# Altium PCB PCB_SOLDER_HOTAIR_STATION_V1.0_06052016.PcbDoc (part 1 of 2)
Units mil, origin at the board's own origin, x right, y up, seen from the top; angles counter-clockwise.
Board outline 3402 x 1915 mil, 2 copper layers (Top Layer, Bottom Layer); 77 components, 65 nets, 244 pads, 86 vias.
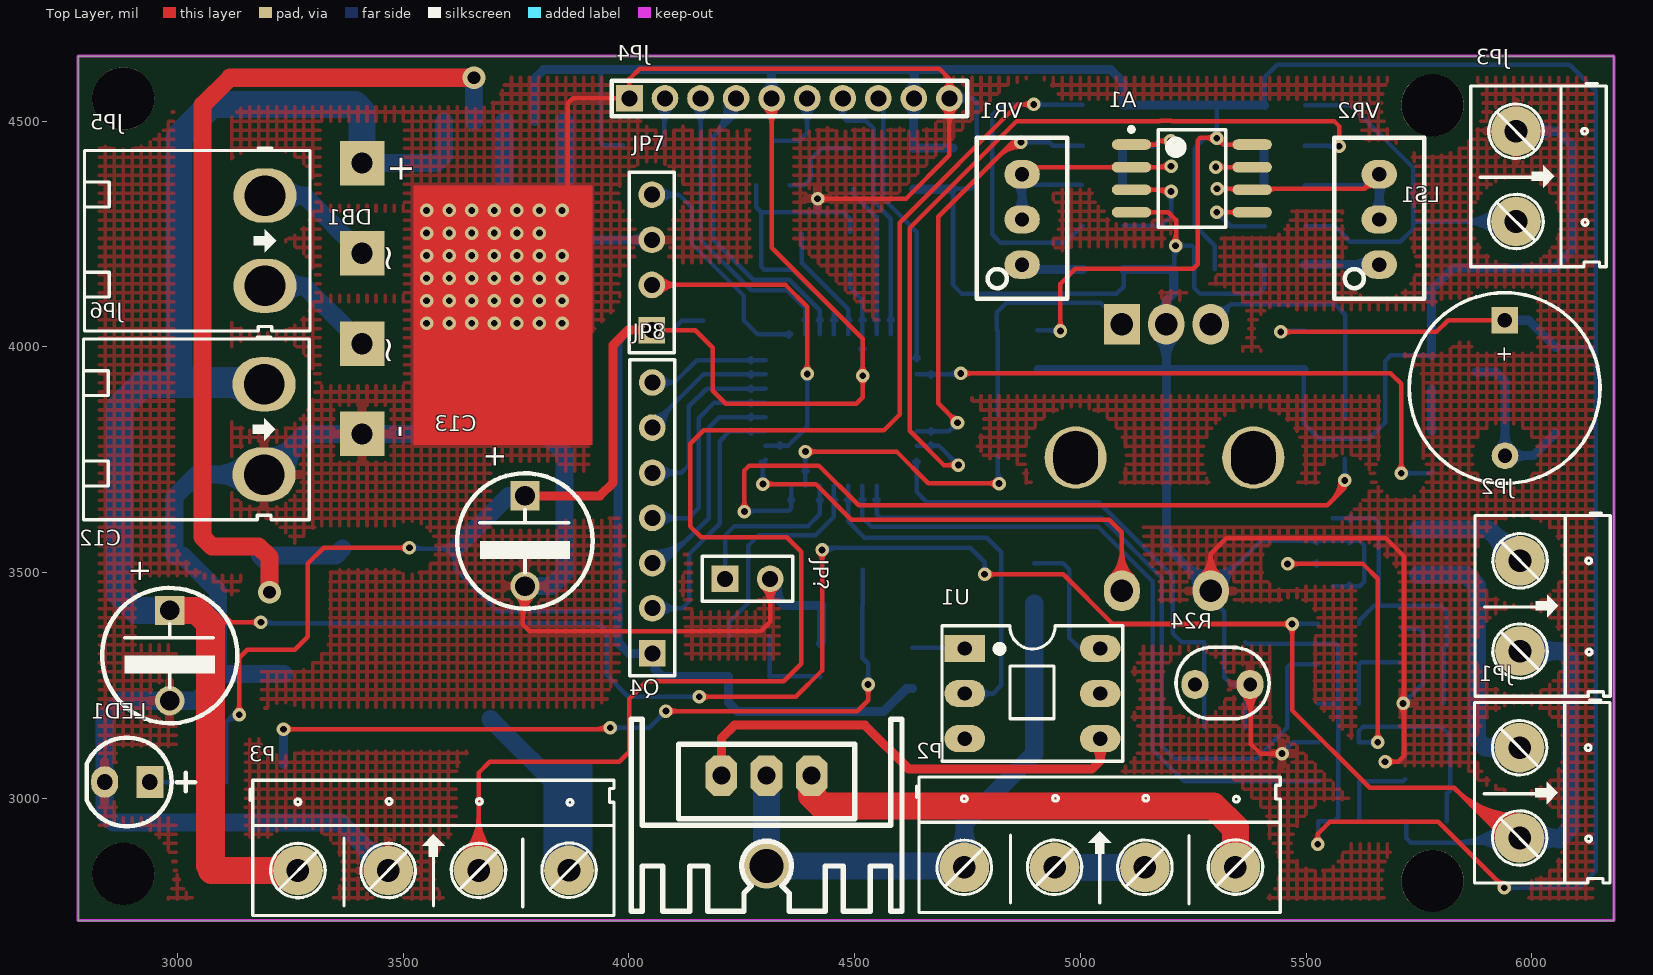
[diagram p0: Top Layer view]
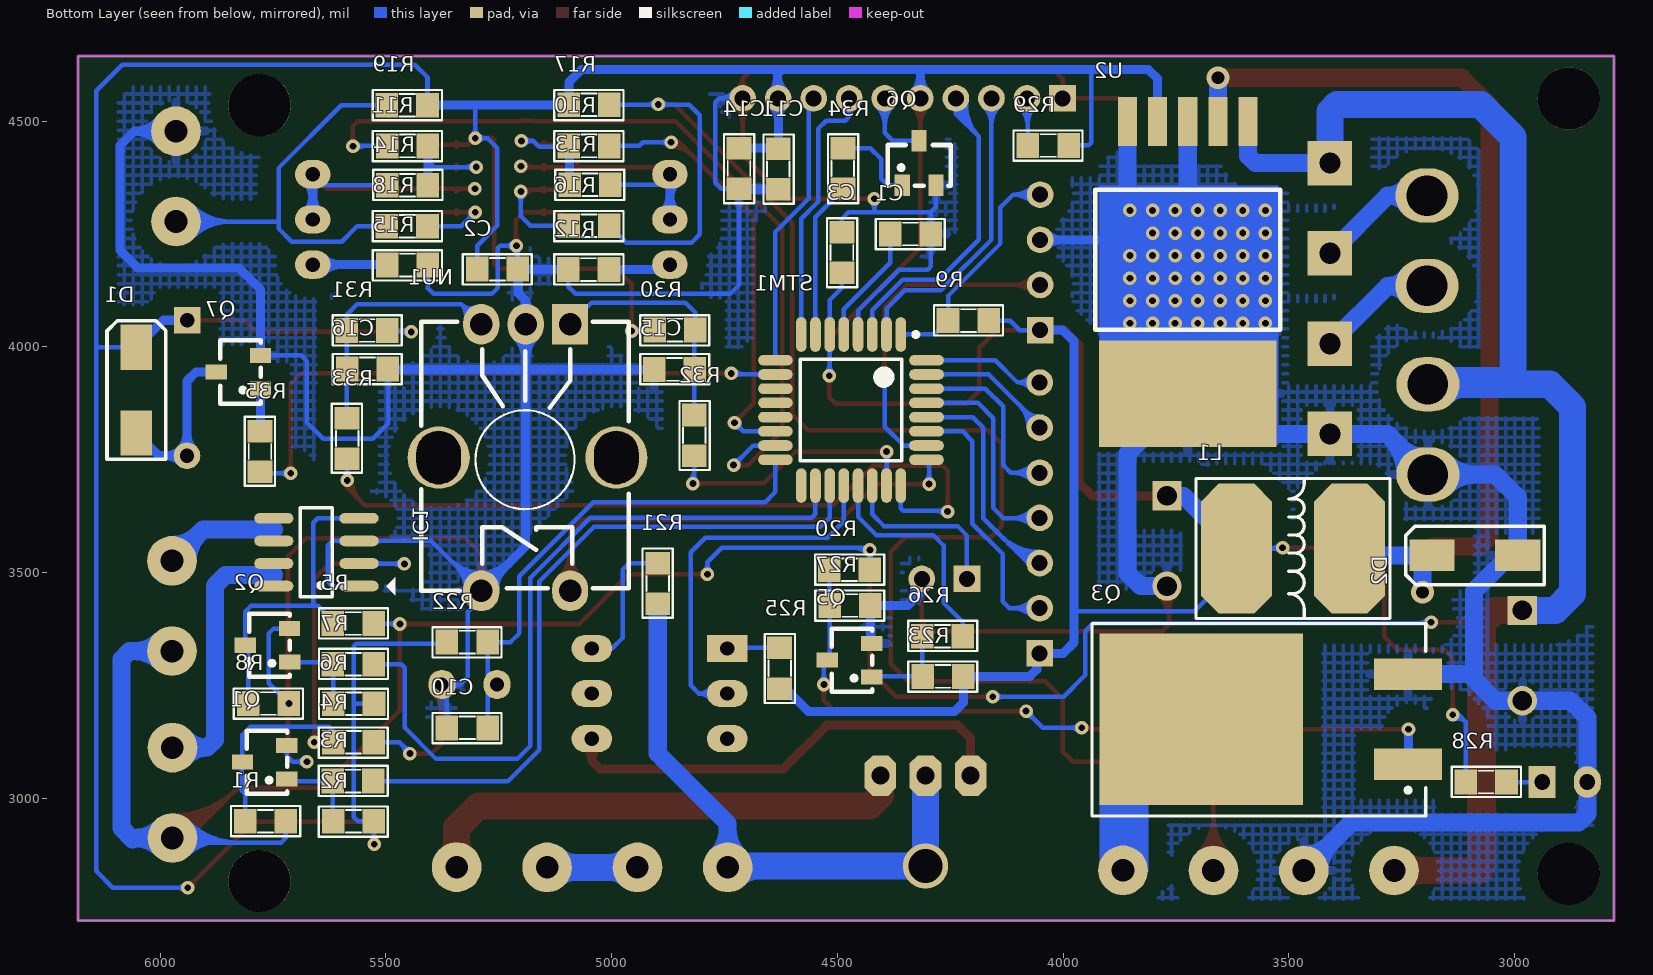
[diagram p1: Bottom Layer view, seen from below]

## Layer stack, top to bottom
Top Solder: solder mask 0.4, Solder Resist, Dk 3.5
Top Layer: signal copper 1.4
Dielectric 1: dielectric 12.6, FR-4, Dk 4.8
Bottom Layer: signal copper 1.4
Bottom Solder: solder mask 0.4, Solder Resist, Dk 3.5

## Board outline
2780,2729 6182,2729 6182,4644 2780,4644

## Design rules (kind name [scope] priority, off if disabled: settings)
Clearance Polygon [InPolygon] p1: gap=40
Clearance [All] p2: gap=10
PolygonConnect [All] p1: connectstyle=Relief reliefconductorwidth=20 reliefentries=4 polygonreliefangle="90 Angle" airgapwidth=10
RoutingVias [All] p1: holewidth=28 width=50 viastyle="Through Hole" minholewidth=15 minwidth=30 maxholewidth=28 maxwidth=50
SolderMaskExpansion [All] p1: expansion=4
Width [All] p1: maxlimit=60 minlimit=10 preferedwidth=20
30 further rules are at their usual default settings.

## Components (designator, comment, footprint, x,y, rotation, side; value= is the part's Value field where it differs from the comment)
A1 "LM358" SO-8N 5247,4373 r0 top
C1 "104" "Tu 0805" 4338,4250 r180 bottom
C2 "104" "Tu 0805" 5253,4172 r180 bottom
C3 "104" "Tu 0805" 4490,4209 r90 bottom
C10 "104" "Tu 0805" 5320,3156 r180 bottom
C11 "104" "Tu 0805" 4631,4394 r90 bottom
C12 "Tu Nhom 100uF - 50V" CAP1000uF25V 2983,3316 r90 top
C13 "Tu Nhom 470uF - 16V" CAP1000uF25V 3770,3570 r90 top
C14 "104" "Tu 0805" 4718,4395 r90 bottom
C15 "104" "Tu 0805" 4861,3950 r0 bottom
C16 "104" "Tu 0805" 5541,3951 r180 bottom
D1 "1N4007" "DO - SMB" 6053,3904 r270 bottom
D2 "Diode SS34" "DO - SMB" 3088,3538 r180 bottom
DB1 "KBU1008" "DIODE BRIDGE(FLAT) BIG" 3383,4107 r270 top
IC1 "APM4953" SO-8 5654,3545 r0 bottom
JP1 "?" "Con 2 KF301 5.08" 6013,2797 r270 top
JP2 "?" "Con 2 KF301 5.08" 6014,3211 r270 top
JP3 "?" "Con 2 KF301 5.08" 6005,4162.5 r270 top
JP4 "HEADER 10" "HDR1x10  2.0MM" 4001.37,4550.37 r0 top
JP5 "?" "CON 2 EDG 5.08" 3194,4335 r270 top
JP6 "?" "CON 2 EDG 5.08" 3192,3917 r270 top
JP7 "Jump 1x4 DT 2.54" HDR1X4 4051,4037 r90 top
JP8 "Jump 1x7 DT 2.54" HDR1X7 4052,3321 r90 top
JP? "Jump 1x2 DT 2.54" HDR1X2 4213,3486 r0 top
L1 "100uH CD74" "Cuon Cam 7.5x7x5" 3341,3553 r90 bottom
LED1 "LED0805 Màu Do" "LED 3mm Do" 2889,3036 r180 top
LS1 "SPEAKER" SPEAKER 5940.23,4058.79 r270 top
NU1 "Num Xoay EC11" "Num Xoay EC11" 5092,4050 r0 bottom
P2 "Header 4" "Con 4 KF301 5.08" 5108,2907 r0 top
P3 "Header 4" "Con 4 KF301 5.08" 3632,2900 r0 top
Q1 "S8050" SOT23B 5763.66,3085 r90 bottom
Q2 "S8050" SOT23B 5757.66,3344 r90 bottom
Q3 "IRF3709" TO_263_2 3494,3175 r0 bottom
Q4 "TRIAC" QTO-220H3 4405,3050 r180 top
Q5 "S8050" SOT23B 4468,3311 r90 bottom
Q6 "C1815" SOT23B 4314,4402 r180 bottom
Q7 "S8050" SOT23B 5822,3949 r90 bottom
R1 "4.7k" "Tro SMD 0805" 5767,2949 r0 bottom
R2 "4.7k" "Tro SMD 0805" 5572,2949 r180 bottom
R3 "1k" "Tro SMD 0805" 5573,3038 r0 bottom
R4 "4.7k" "Tro SMD 0805" 5572,3124 r180 bottom
R5 "4.7k" "Tro SMD 0805" 5572.5,3387 r0 bottom
R6 "4.7k" "Tro SMD 0805" 5571.5,3209.5 r180 bottom
R7 "1k" "Tro SMD 0805" 5572.5,3297 r0 bottom
R8 "4.7k" "Tro SMD 0805" 5760,3210 r180 bottom
R9 "4.7K" "Tro SMD 0805" 4210,4058 r0 bottom
R10 "100K" "Tro SMD 0805" 5050,4445 r180 bottom
R11 "100K" "Tro SMD 0805" 5452,4445 r180 bottom
R12 "1.5K" "Tro SMD 0805" 5051,4171 r0 bottom
R13 "390K" "Tro SMD 0805" 5048,4359 r180 bottom
R14 "390K" "Tro SMD 0805" 5452,4358 r0 bottom
R15 "1.5K" "Tro SMD 0805" 5452,4181 r180 bottom
R16 "10K" "Tro SMD 0805" 5050,4268 r180 bottom
R17 "1.5K" "Tro SMD 0805" 5050,4536 r180 bottom
R18 "10K" "Tro SMD 0805" 5453,4267 r0 bottom
R19 "1.5K" "Tro SMD 0805" 5453,4535 r0 bottom
R20 "4.7k" "Tro SMD 0805" 4473,3506 r0 bottom
R21 "470R" "Tro SMD 0805" 4898,3476 r270 bottom
R22 "15K" "Tro SMD 0805" 5320,3346 r180 bottom
R23 "4.7k" "Tro SMD 0805" 4266,3270 r180 bottom
R24 "NTC10D" "NTC MF52T" 5411,3255 r0 top
R25 "Tro 0805 5% 200R" "Tro SMD 0805" 4628,3288 r90 bottom
R26 "1k" "Tro SMD 0805" 4267,3359 r0 bottom
R27 "4.7k" "Tro SMD 0805" 4472,3427 r180 bottom
R28 "Tro 0805 1K 5%" "Tro SMD 0805" 3063,3036 r0 bottom
R29 "Tro 0805 4.7k" "Tro SMD 0805" 4033,4446 r180 bottom
R30 "10k" "Tro SMD 0805" 4860,4037 r180 bottom
R31 "10k" "Tro SMD 0805" 5542,4036 r0 bottom
R32 "10k" "Tro SMD 0805" 4817,3804 r90 bottom
R33 "10k" "Tro SMD 0805" 5586,3797 r270 bottom
R34 "Tro 0805 1k" "Tro SMD 0805" 4488,4395 r90 bottom
R35 "Tro 0805 1k" "Tro SMD 0805" 5779,3768 r270 bottom
STM1 "STM8S003K3" 32A_M 4470,3860 r270 bottom
U1 "MOC3021" DIP6 4744,3332 r270 top
U2 "LM2576S-3.3V" TO263-5 3724,4498 r0 bottom
VR1 "100K" RVAR10K 4871,4282 r90 top
VR2 "100K" RVAR10K 5662,4282 r90 top

## Footprints (in the part's own frame and the unit in brackets; to place one, negate y for a bottom-side part, rotate by r counter-clockwise, add the part's x,y. Pads: shape width x height; smd on the part's side, far side on the other; paste and mask are expansions set on the pad)
32A_M [mm] "Thin QFP, 32-Leads, Body 7x7mm, Pitch 0.8mm, IPC Low Density"
  oval 1.95x0.6 smd: 1(-4.25,2.8) 2(-4.25,2) 3(-4.25,1.2) 4(-4.25,0.4) 5(-4.25,-0.4) 6(-4.25,-1.2) 7(-4.25,-2) 8(-4.25,-2.8) 17(4.25,-2.8) 18(4.25,-2) 19(4.25,-1.2) 20(4.25,-0.4) 21(4.25,0.4) 22(4.25,1.2) 23(4.25,2) 24(4.25,2.8)
  oval 0.6x1.95 smd: 9(-2.8,-4.25) 10(-2,-4.25) 11(-1.2,-4.25) 12(-0.4,-4.25) 13(0.4,-4.25) 14(1.2,-4.25) 15(2,-4.25) 16(2.8,-4.25) 25(2.8,4.25) 26(2,4.25) 27(1.2,4.25) 28(0.4,4.25) 29(-0.4,4.25) 30(-1.2,4.25) 31(-2,4.25) 32(-2.8,4.25)
  silkscreen extent -4.37,-2.85 2.85,3.77, body extent -4.49,-4.52 4.54,4.52, height 1.61
CAP1000uF25V [mil]
  rect 65x65 hole 43.31: 1(100,0)
  round 65 hole 43.31: 2(-100,0)
  silkscreen extent -150,-150 150,150, body extent -195,-200 205,200, height 400
"CON 2 EDG 5.08" [mil] "Header 2, 2 pin, hight 300mil, Pin to Pin 200, Colour Green"
  oval 120x140 hole 90: 1(0,0) 2(200,0)
  silkscreen extent -105,-400 300,100, body extent -97,-399 297,73, height 334
"Con 2 KF301 5.08" [mil]
  round 110 hole 50: 1(-315,-40) 2(-115,-40)
  silkscreen extent -421,-140 -15,160, body extent -360,-137 -60,150, height 335
"Con 4 KF301 5.08" [mil]
  round 110 hole 50: 1(-365,-60) 2(-165,-60) 3(35.06,-59.94) 4(235.39,-59.61)
  silkscreen extent -471,-160 335,140
"Cuon Cam 7.5x7x5" [mm]
  oct 7.3x4 smd: 1(0,0.635) 2(0,6.985)
  silkscreen extent -3.94,-1.65 3.94,9.27, body extent -3.5,0.07 3.5,7.8, height 5.02
"DIODE BRIDGE(FLAT) BIG" [mil]
  rect 98.43x98.43 hole 47.24: 1(-300,26) 2(-100,26) 3(100,26) 4(300,26)
  body extent -439,-70 439,78, height 956
DIP6 [mil] "6 PIN, W 300mil, Pin to pin 100mil"
  rect 60x90 hole 31.5: 1(0,0)
  oval 60x90 hole 31.5: 2(100,0) 3(200,0) 4(200,300) 5(100,300) 6(0,300)
  silkscreen extent -50,-50 250,350, body extent -58,-7 260,307, height 170
"DO - SMB" [mil]
  rect 100x70 smd: 1(95,0) 2(-95,0)
  silkscreen extent -154,-65 154,65, body extent -108,-55 108,55, height 91
HDR1X2 [mm] "Connector; Header; 2 Position"
  rect 1.5x1.5 hole 0.9: 1(0,0)
  round 1.5 hole 0.9: 2(2.54,0)
  silkscreen extent -1.27,-1.27 3.81,1.27, body extent -1.27,-1.27 3.81,1.27, height 7
HDR1X4 [mm] "Connector; Header; 4 Position"
  rect 1.5x1.5 hole 0.9: 1(0,0)
  round 1.5 hole 0.9: 2(2.54,0) 3(5.08,0) 4(7.62,0)
  silkscreen extent -1.27,-1.27 8.89,1.27, body extent -1.27,-1.27 8.89,1.27, height 7
HDR1X7 [mm] "Connector; Header; 7 Position"
  rect 1.5x1.5 hole 0.9: 1(0,0)
  round 1.5 hole 0.9: 2(2.54,0) 3(5.08,0) 4(7.62,0) 5(10.16,0) 6(12.7,0) 7(15.24,0)
  silkscreen extent -1.27,-1.27 16.51,1.27, body extent -1.27,-1.27 16.51,1.27, height 7
"HDR1x10  2.0MM" [mm]
  rect 1.5x1.5 hole 0.9: 1(0,0)
  round 1.5 hole 0.9: 2(2,0) 3(4,0) 4(6,0) 5(8,0) 6(10,0) 7(12,0) 8(14,0) 9(16,0) 10(18,0)
  silkscreen extent -1,-1 19,1, body extent -1,-1 19,0.95, height 5.52
"LED 3mm Do" [mil] "Footprintf LED phi 3"
  rect 60x70 hole 35: 1(-50,0)
  oval 60x70 hole 35: 2(50,0)
  silkscreen extent -150,-98 90,98, body extent -78,-79 60,79, height 205
"NTC MF52T" [mil] "Capacitor, Ceramic, ThrNTC 2A"
  oval 60x65 hole 30: 1(-157,-3) 2(-35,-3)
  silkscreen extent -199,-79 7,79, body extent -214,-77 22,73, height 199
"Num Xoay EC11" [mm]
  rect 2.032x2.286 hole 1.27: 1(0,0)
  oval 2.032x2.286 hole 1.27: 2(2.5,0) 3(5,0) 4(0,15) 5(5,15)
  round 3.5 hole 2.5 slot 3 at 90 deg: 6(-2.601,7.5) 7(7.396,7.5)
  silkscreen extent -3.3,-0.13 8.38,14.99, body extent -3.32,-0.11 8.4,14.84, height 24.5
QTO-220H3 [mil] "TO-220 1-2-3"
  oct 70x90 hole 40: 1(0,0) 2(100,0) 3(200,0)
  round 100 hole 75: 2(100,200)
  silkscreen extent -200,-125 400,300, body extent -190,-102 392,323, height 984
RVAR10K [mm] "Bien tro vi chinh"
  oval 1.6x2 hole 0.8: 1(-2.54,0) 2(0,0) 3(2.54,0)
  silkscreen extent -4.47,-2.54 4.6,2.54, body extent -4.54,-2.4 4.66,2.4, height 12.02
SO-8 [mm] "8-Pin Small Outline Integrated Circuit 1.27 mm Pitch, IPC Medium Density"
  oval 2.2x0.6 smd: 1(-2.4,1.905) 2(-2.4,0.635) 3(-2.4,-0.635) 4(-2.4,-1.905) 5(2.4,-1.905) 6(2.4,-0.635) 7(2.4,0.635) 8(2.4,1.905)
  silkscreen extent -4.44,-2.5 0.9,2.5, body extent -2.89,-2.43 3.15,2.59, height 1.6
SO-8N [mm] "SOP, 8-Leads, Body 5.3x5.3mm, Pitch 1.27mm, IPC Medium Density"
  oval 2.2x0.6 smd: 1(-3.4,1.905) 2(-3.4,0.635) 3(-3.4,-0.635) 4(-3.4,-1.905) 5(3.4,-1.905) 6(3.4,-0.635) 7(3.4,0.635) 8(3.4,1.905)
  silkscreen extent -3.52,-2.75 1.9,2.88, body extent -3.05,-2.54 3,2.48, height 1.6
SOT23B [mm] "SOT 23B"
  rect 0.85x1.2 smd: 1(-1.077,-1.123) 2(-0.127,1.377) 3(0.813,-1.118)
  silkscreen extent -1.91,-1.14 1.65,1.14, body extent -1.63,-1.17 1.37,1.33, height 1.06
SPEAKER [mm]
  rect 1.5x1.5 hole 0.8: 1(0,0)
  round 1.5 hole 0.8: 2(7.62,0.013)
  silkscreen extent -1.55,-5.38 9.18,5.36, body extent -5.67,-6 9.78,6, height 3.99
TO263-5 [mm] "LM2576-SMD"
  rect 1.07x2.75 smd: 1(-3.4,-0.025) 2(-1.7,-0.025) 3(0,-0.025) 4(1.7,-0.025) 5(3.4,-0.025)
  rect 10x6 smd: 6(0,15.289)
  silkscreen extent -5.21,3.81 5.21,11.68, body extent -5,-0.38 5,15.29, height 4.79
TO_263_2 [mil]
  rect 150x70 smd: 1(-257.87,100) 3(-257.87,-100)
  rect 450x380 smd: 2(200,0)
  silkscreen extent -297,-212 442,214, body extent -265,-198 336,202, height 188
"Tro SMD 0805" [mil]
  rect 50x55 smd: 1(-45,0) 2(45,0)
  silkscreen extent -77,-34 76,33, body extent -62,-28 56,27, height 21
"Tu 0805" [mil] "Compoment SMD 80x50mil"
  rect 50x55 smd: 1(-45,0) 2(45,0)
  silkscreen extent -77,-34 76,33, body extent -40,-27 40,23, height 24

## Part data
C1 C2 C3 C10 C11 C14: library part CAP, "Capacitor"
C12: library part Cap1000uF35V, "[MH002223]Tu Nhom 100UF 50V 8x10.2MM"
C13: library part Cap1000uF35V, "[MH001940]Tu Nhôm 470uF 16V 8x10.4MM"
C15 C16: library part "Tu 0805", "T? 0805"
D1: library part DIODE, "Diode"
D2: library part D1A, "[MH002104]Diode SS34 3A 40V SMA (Schottky 1N5822 3A)"
DB1: library part "Diode Bridge KBU1008", "Diode Bridge"
IC1: "Dual P-Channel Enhancement Mode MOSFET"
JP1 JP2 JP3 JP5 JP6: library part "KF142 2P", "KF 142 2P"
JP7: "Jump 1x4 ð?c th?ng 2.54"
JP8: "Jump 1x7 ð?c th?ng 2.54"
JP?: "Jump 1x2 ð?c th?ng 2.54"
L1: library part L100uH3A, "[MH003999]Cuon Cam 100uH 7x7x4MM CD74"
LED1: library part "LED 3mm", "[MH000897] LED0805 Màu Do ( Red)"
P2 P3: "Header, 4-Pin"
Q1 Q2 Q5 Q7: library part C1815, "NPN 600mW, ECB"
Q3: library part IRF840, "MOSFET N - CHANNEL 500V - 0.75 - 8A - TO-220"
Q6: "NPN 600mW, ECB"
R1 R2 R3 R4 R5 R6 R7 R8 R9 R10 R11 R12 R13 R14 R15 R16 R17 R18 R19 R20 R21 R22 R23 R25 R26 R27 R30 R31 R32 R33 R35: library part "Tro 0805", "Tro 0805"
R28: library part R1/4W, "[R0805_1K] Tro 0805 1K 5%"
R29 R34: library part R1/4W, "Resistor 0805"
U1: "Single Opto"
U2: library part LM2576T-5.0, "[MH001260]LM2576S-5.0V BUCK 5V 3A TO263-5"
VR1 VR2: library part "Var Resitor", "Var Resistor"

## Free pads (board coordinates)
  round 137.8 hole 137.8: 0(2880,2833) 1(2880,4550) 2(5780,4535) 3(5780,2817)

## Via types
v1: diameter 30, hole 15, Top Layer to Bottom Layer, tented both sides, 84 vias
v2: diameter 50, hole 28, Top Layer to Bottom Layer, tented both sides, 2 vias

## Nets (pads, with @x,y where several pads share a name; then routed paths per layer and width w, separated by ;. In a path a pad name is that pad's centre, name@x,y a point inside that pad or via, vN(x,y) a via of type N, cw(c..) or ccw(c..) an arc to the next point about the centre after c; other vN are vias at no path point)
3.3V: A1.8 C2.1 C3.1 C11.2 C13.1 C14.2 D1.2 JP4.5 JP4.9 JP7.1 JP8.1 L1.2 LS1.1 R2.2 R6.2 R9.1 R17.1 R19.1 R22.1 R23.2 R25.1 R28.2 R29.2 R30.1 R31.1 STM1.6 U2.4 | length 15304.9
  Top Layer w10: v1@3129.93,3192.07 ccw(c3112.86,3209.14) 3137,3209.14 ccw(c3161.14,3209.14) v1@3144.07,3192.07 ; v1(3137,3185) 3137,3311 3155,3329 3260,3329 3289,3358 3289,3520 3324,3555 v1(3514,3555) ; v1@3506.93,3547.93 ccw(c3489.86,3530.86) 3489.86,3555 ccw(c3489.86,3579.14) v1@3506.93,3562.07 ; JP7.1@4051,4037 4147,4037 4186,3998 4186,3903 4215,3874 4504,3874 4518,3888 v1(4518,3936) 4518,4018 4316.33,4219.67 JP4.5@4316.33,4550.37 ; JP7.1@4054.54,4033.46 cw(c4063.07,4024.93) 4063.07,4037 cw(c4063.07,4049.07) JP7.1@4054.54,4040.54 ; JP4.5@4298.99,4533.03 cw(c4257.12,4491.16) 4316.33,4491.16 cw(c4375.55,4491.16) JP4.5@4333.67,4533.03 ; JP4.5@4306.06,4540.1 cw(c4281.26,4515.3) 4316.33,4515.3 cw(c4351.4,4515.3) JP4.5@4326.6,4540.1 ; v1@4510.93,3928.93 cw(c4493.86,3911.86) 4518,3911.86 cw(c4542.14,3911.86) v1@4525.07,3928.93 ; v1@4510.93,3943.07 ccw(c4493.86,3960.14) 4518,3960.14 ccw(c4542.14,3960.14) v1@4525.07,3943.07 ; v1@4948.93,4042.07 ccw(c4931.86,4059.14) 4956,4059.14 ccw(c4980.14,4059.14) v1@4963.07,4042.07 ; v1(4956,4035) 4956,4140 4989,4173 5250,4173 5260,4183 5260,4457 5266,4463 5301,4463 v1(5302,4462) 5304,4462 5318,4448 ; 5275.44,4463 cw(c5275.44,4435.44) v1@5294.93,4454.93 ; 5280.27,4463 ccw(c5280.27,4483.73) v1@5294.93,4469.07 ; v1@5304.01,4452.2 cw(c5307.1,4437.1) 5318,4448 ; v1@5312,4462 ccw(c5331.31,4462) 5317.66,4448.34 ; A1.8@5344.55,4443.18 ccw(c5332.92,4431.56) 5332.92,4448 ccw(c5332.92,4464.44) A1.8@5344.55,4452.82 ; A1.8@5380.86,4448 5318,4448 ; v1(5444,4033) 5789,4033 5814.79,4058.79 LS1.1@5940.23,4058.79 ; v1@5451.07,4025.93 cw(c5468.14,4008.86) 5468.14,4033 cw(c5468.14,4057.14) v1@5451.07,4040.07 ; v1@5519.18,2905.31 ccw(c5504.55,2921) 5526,2921 ; v1(5526,2898) 5526,2921 ; v1@5532.82,2905.31 cw(c5547.45,2921) 5526,2921 ; v1@5929,2802 ccw(c5904.86,2802) 5921.93,2819.07 ccw(c5939,2836.14) v1@5939,2812 ; v1(5939,2802) 5793,2948 5553,2948 5526,2921
  Top Layer w20: C13.1@3770,3670 3936,3670 3965,3699 3965,4004 3998,4037 JP7.1@4051,4037
  Bottom Layer w10: R28.2@3108,3036 3108,3169 ; 3119.72,3180.72 cw(c3131.91,3168.54) v1(3137,3185) 3124,3185 3108,3169 ; v1@3134.04,3175.45 ccw(c3126.37,3150.64) 3108,3169 ; v1(3514,3555) 3516,3553 L1.2@3616,3553 3616,3507 3709,3414 3976,3414 ; v1@3521.07,3547.93 cw(c3533.31,3535.69) 3533.31,3553 ; v1@3521.07,3562.07 ccw(c3542.97,3583.97) L1.2@3542.97,3553 ; L1.2@3605.39,3563.61 cw(c3579.79,3589.21) 3579.79,3553 cw(c3579.79,3516.79) 3605.39,3542.39 cw(c3579.79,3516.79) 3616,3516.79 cw(c3652.21,3516.79) L1.2@3626.61,3542.39 ; 3934.46,4610.46 cw(c3925.93,4601.93) 3938,4601.93 cw(c3950.07,4601.93) 3941.54,4610.46 ; 3938,4614 3938,4452 3944,4446 R29.2@3988,4446 ; 3972.46,3410.46 ccw(c3963.93,3401.93) 3963.93,3414 ccw(c3963.93,3426.07) 3972.46,3417.54 ; JP7.1@4051,4037 4096,4037 4117,4058 R9.1@4165,4058 ; JP7.1@4054.54,4033.46 cw(c4063.07,4024.93) 4063.07,4037 cw(c4063.07,4049.07) JP7.1@4054.54,4040.54 ; C3.1@4490,4164 4490,4131 4517.24,4103.76 STM1.6@4517.24,4027.32 4517.24,3936.76 v1(4518,3936) ; v1@4510.93,3943.07 ccw(c4495.68,3958.32) 4517.24,3958.32 ; STM1.6@4512.43,3995.93 cw(c4500.8,3984.3) 4517.24,3984.3 cw(c4533.69,3984.3) STM1.6@4522.06,3995.93 ; STM1.6@4512.43,4058.71 ccw(c4500.8,4070.34) 4517.24,4070.34 ccw(c4533.69,4070.34) STM1.6@4522.06,4058.71 ; 4517.24,3961.97 ccw(c4543.97,3961.97) v1@4525.07,3943.07 ; R30.1@4905,4037 4954,4037 v1(4956,4035) ; R30.1@4927.03,4037 cw(c4927.03,4006.03) v1@4948.93,4027.93 ; 4936.69,4037 ccw(c4936.69,4054.31) v1@4948.93,4042.07 ; v1@5294.93,4454.93 ccw(c5277.86,4437.86) 5277.86,4462 ccw(c5277.86,4486.14) 5294.93,4469.07 ccw(c5277.86,4486.14) 5302,4486.14 ccw(c5326.14,4486.14) v1@5309.07,4469.07 ; C2.1@5298,4172 5298,4224 5253,4269 5253,4440 5275,4462 v1(5302,4462) 5302,4533 5305,4536 ; R22.1@5365,3346 5369,3342 5566,3342 5571,3337 5571,3211 ; R19.1@5404.46,4538.54 ccw(c5395.93,4547.07) 5408,4547.07 ccw(c5420.07,4547.07) R19.1@5411.54,4538.54 ; R19.1@5408,4535 5408,4597 5436,4625 6084,4625 6142,4567 6142,3999 ; v1(5444,4033) 5447,4036 R31.1@5497,4036 ; v1@5451.07,4025.93 cw(c5475.38,4001.62) R31.1@5475.38,4036 ; v1@5451.07,4040.07 ccw(c5460.9,4049.9) 5460.9,4036 ; v1@5518.93,2905.07 ccw(c5499.44,2924.56) R2.2@5527,2924.56 ; v1(5526,2898) 5527,2899 R2.2@5527,2949 5562,2949 5571,2958 5571,3211 ; R6.2@5526.5,3209.5 5569.5,3209.5 5571,3211 ; 5527,2919.73 ccw(c5547.73,2919.73) v1@5533.07,2905.07 ; v1(5939,2802) 6105,2802 6142,2839 6142,3999 ; v1@5946.07,2794.93 cw(c5963.14,2777.86) 5963.14,2802 cw(c5963.14,2826.14) v1@5946.07,2809.07 ; D1.2@6053,3999 6142,3999 ; D1.2@6056.54,3995.46 cw(c6065.07,3986.93) 6065.07,3999 cw(c6065.07,4011.07) D1.2@6056.54,4002.54
  Bottom Layer w20: U2.4@3790.93,4499 3790.93,4593.93 3811,4614 3938,4614 4314,4614 ; JP7.1@4051,4037 4001,4037 3976,4012 3976,3414 3976,3345 4000,3321 JP8.1@4052,3321 4058.5,3314.5 4058.5,3285.5 4074,3270 R23.2@4221,3270 4221,3212 4241,3192 4564,3192 4615,3243 R25.1@4628,3243 ; JP4.5@4302.52,4564.18 ccw(c4269.19,4597.51) 4316.33,4597.51 ccw(c4363.47,4597.51) JP4.5@4330.14,4564.18 ; JP4.5@4316.33,4550.37 4316.33,4611.67 4314,4614 ; JP4.9@4617.48,4536.56 cw(c4584.85,4503.93) 4631,4503.93 ; JP4.9@4617.48,4564.18 ccw(c4580.02,4601.64) 4633,4601.64 ; 4631,4502.52 cw(c4679.14,4502.52) JP4.9@4645.1,4536.56 ; 4633,4593.39 ccw(c4674.31,4593.39) JP4.9@4645.1,4564.18 ; C14.2@4718,4440 4632,4440 C11.2@4631,4439 4631,4550.08 JP4.9@4631.29,4550.37 4633,4552.08 4633,4604 4623,4614 ; R19.1@5408,4535 5407,4536 5305,4536 R17.1@5095,4536 5095,4586 5067,4614 4623,4614 ; LS1.1@5940.23,4058.79 5993.21,4058.79 D1.2@6053,3999 ; 4314,4614 4623,4614
  Bottom Layer w40: L1.2@3616,3553 3733,3670 C13.1@3770,3670
24V: C12.1 DB1.1 JP1.2 JP2.2 JP6.1 P3.1 R1.1 R5.1 R20.1 U2.1 | length 10677
  Top Layer w10: 3071,3388 3073,3390 3119,3390 ; 3104,3405 3119,3390 ; v1@3177.93,3382.93 ccw(c3160.86,3365.86) 3160.86,3390 ccw(c3160.86,3414.14) v1@3177.93,3397.07 ; v1(3185,3390) 3119,3390 ; v1(4156,3225) 4370,3225 4428,3283 v1(4428,3550) ; v1@4163.07,3217.93 cw(c4180.14,3200.86) 4180.14,3225 cw(c4180.14,3249.14) v1@4163.07,3232.07 ; v1@4420.93,3542.93 cw(c4403.86,3525.86) 4428,3525.86 cw(c4452.14,3525.86) v1@4435.07,3542.93 ; v1(4788,3496) 4962,3496 5072,3386 v1(5469,3386) 5469,3195 5641,3023 5828,3023 5939,2912 JP1.2@5973,2912 cw(c5973,2994.08) 5914.96,2936.04 ; v1@4795.07,3488.93 cw(c4812.14,3471.86) 4812.14,3496 cw(c4812.14,3520.14) v1@4795.07,3503.07 ; v1@5461.93,3393.07 cw(c5444.86,3410.14) 5444.86,3386 cw(c5444.86,3361.86) 5461.93,3378.93 cw(c5444.86,3361.86) 5469,3361.86 cw(c5493.14,3361.86) v1@5476.07,3378.93 ; 5829.6,3021.4 ccw(c5973,3164.79) JP1.2@5973,2962 ; 5846.67,3004.33 ccw(c5973,3130.65) JP1.2@5973,2952 ; 5863.75,2987.25 ccw(c5973,3096.51) JP1.2@5973,2942 ; 5880.82,2970.18 ccw(c5973,3062.37) JP1.2@5973,2932 ; 5897.89,2953.11 ccw(c5973,3028.23) JP1.2@5973,2922 ; 5911.69,2939.31 cw(c5884.37,2912) JP1.2@5923,2912
  Top Layer w60: C12.1@2983,3416 3043,3416 3071,3388 ; 3071,2851 3071,3388 ; P3.1@3249.32,2822.32 ccw(c3206.64,2779.64) 3206.64,2840 ccw(c3206.64,2900.36) P3.1@3249.32,2857.68 ; P3.1@3267,2840 3076,2840 3076,3383 3071,3388
  Bottom Layer w10: v1(3185,3390) 3187,3388 3933,3388 3951,3370 3951,3273 3999,3225 v1(4156,3225) ; v1@3192.07,3382.93 cw(c3204.31,3370.69) 3204.31,3388 ; v1@3192.07,3397.07 ccw(c3213.97,3418.97) 3213.97,3388 ; v1@4148.93,3217.93 ccw(c4131.86,3200.86) 4131.86,3225 ccw(c4131.86,3249.14) v1@4148.93,3232.07 ; v1@4420.93,3542.93 cw(c4403.86,3525.86) 4428,3525.86 cw(c4452.14,3525.86) 4435.07,3542.93 cw(c4464.21,3513.79) 4464.21,3555 ; R20.1@4428,3506 v1(4428,3550) 4433,3555 4756,3555 4788,3523 v1(4788,3496) ; v1@4780.93,3503.07 ccw(c4763.86,3520.14) 4788,3520.14 ccw(c4812.14,3520.14) v1@4795.07,3503.07 ; v1(5469,3386) 5470,3387 R5.1@5527.5,3387 ; v1@5476.07,3378.93 cw(c5495.56,3359.44) 5495.56,3387 ; v1@5476.07,3393.07 ccw(c5490.73,3407.73) 5490.73,3387 ; R1.1@5722,2949 5722,2912 5732,2902 5963,2902 JP1.2@5973,2912 ; 5828.15,2902 ccw(c5828.15,3056.85) JP1.2@5937.64,2947.36 ; 5852.29,2902 ccw(c5852.29,3032.71) JP1.2@5944.72,2940.28 ; JP1.2@5937.64,2876.64 ccw(c5876.43,2815.43) 5876.43,2902 ccw(c5876.43,3008.57) JP1.2@5951.79,2933.21 ; JP1.2@5944.72,2883.72 ccw(c5900.57,2839.57) 5900.57,2902 ccw(c5900.57,2984.43) JP1.2@5958.86,2926.14
  Bottom Layer w40: DB1.1@3409,4407 3574,4407 3590.14,4423.14 U2.1@3590.14,4499 ; JP1.2@5973,2912 6058,2912 6061,2909 6086,2934 6086,3308 6068,3326 JP2.2@5974,3326 ; JP1.2@5997.75,2887.25 cw(c6057.5,2827.5) 6057.5,2912 cw(c6057.5,2996.5) JP1.2@5997.75,2936.75 ; JP2.2@5998.75,3301.25 cw(c6058.5,3241.5) 6058.5,3326 cw(c6058.5,3410.5) JP2.2@5998.75,3350.75
  Bottom Layer w60: C12.1@2983,3416 2910,3416 2872,3454 2872,3867 2922,3917 JP6.1@3192,3917 3184,3925 3004,3925 3004,4465 3076,4537 3393,4537 3409,4521 DB1.1@3409,4407 ; JP6.1@3160.79,3895.79 ccw(c3109.57,3844.57) 3109.57,3917 ccw(c3109.57,3989.43) JP6.1@3160.79,3938.21
B1: NU1.4 STM1.25 | length 1354.2
  Top Layer w10: v1(4297,3696) 4414,3696 4493,3617 5064,3617 5092,3589 NU1.4@5092,3459.45 ; v1@4304.07,3688.93 cw(c4321.14,3671.86) 4321.14,3696 cw(c4321.14,3720.14) v1@4304.07,3703.07 ; NU1.4@5067.25,3489.2 ccw(c5007.5,3548.95) 5092,3548.95 ccw(c5176.5,3548.95) NU1.4@5116.75,3489.2 ; NU1.4@5074.32,3482.13 ccw(c5031.64,3524.8) 5092,3524.8 ccw(c5152.36,3524.8) NU1.4@5109.68,3482.13
  Bottom Layer w10: v1@4289.93,3703.07 ccw(c4272.86,3720.14) 4297,3720.14 ccw(c4321.14,3720.14) v1@4304.07,3703.07 ; STM1.25@4292.18,3744.95 cw(c4280.56,3733.32) 4297,3733.32 cw(c4313.44,3733.32) STM1.25@4301.82,3744.95 ; v1(4297,3696) 4297,3744.09 STM1.25@4302.68,3749.76
B2: R32.1 STM1.23 | length 774.6
  Top Layer w10: v1(4391,3768) 4593,3768 4663,3698 4819,3698 v1(4820,3697) ; v1@4398.07,3760.93 cw(c4415.14,3743.86) 4415.14,3768 cw(c4415.14,3792.14) v1@4398.07,3775.07 ; 4793.44,3698 cw(c4793.44,3670.44) v1@4812.93,3689.93 ; 4798.27,3698 ccw(c4798.27,3718.73) v1@4812.93,3704.07
  Bottom Layer w10: v1@4383.93,3760.93 cw(c4366.23,3743.23) 4391.26,3743.23 ; STM1.23@4386.44,3724.07 ccw(c4374.82,3735.7) 4391.26,3735.7 ccw(c4407.7,3735.7) STM1.23@4396.08,3724.07 ; v1(4391,3768) 4391.26,3767.74 STM1.23@4391.26,3692.68 ; 4391.26,3744.49 cw(c4414.51,3744.49) v1@4398.07,3760.93 ; v1@4812.93,3704.07 ccw(c4803.1,3713.9) 4817,3713.9 ; 4817,3728.38 ccw(c4851.38,3728.38) v1@4827.07,3704.07 ; R32.1@4817,3759 4817,3700 v1(4820,3697)
B3: R33.2 STM1.24 | length 1918.3
  Top Layer w10: v1@4248.93,3642.07 ccw(c4231.86,3659.14) 4256,3659.14 ccw(c4280.14,3659.14) v1@4263.07,3642.07 ; v1(4256,3635) 4256,3726 4267,3737 4421,3737 4509,3649 5547,3649 5586,3688 v1(5586,3704) cw(c5547.37,3704) 5574.69,3676.69 ; 5557.62,3659.62 ccw(c5513.23,3704) v1@5576,3704
  Bottom Layer w10: v1(4256,3635) 4258,3637 4354,3637 4359.76,3642.76 STM1.24@4359.76,3692.68 ; v1@4263.07,3627.93 cw(c4284.97,3606.03) 4284.97,3637 ; v1@4263.07,3642.07 ccw(c4275.31,3654.31) 4275.31,3637 ; STM1.24@4354.95,3661.29 cw(c4343.32,3649.66) 4359.76,3649.66 cw(c4376.21,3649.66) STM1.24@4364.58,3661.29 ; v1@5578.93,3711.07 ccw(c5561.86,3728.14) 5586,3728.14 ccw(c5610.14,3728.14) v1@5593.07,3711.07 ; v1(5586,3704) R33.2@5586,3752
BG: R34.1 STM1.7 | length 369.9
  Bottom Layer w10: R34.1@4497,4350 4497,4338.72 4548.74,4286.98 STM1.7@4548.74,4027.32 ; STM1.7@4543.92,4058.71 ccw(c4532.3,4070.34) 4548.74,4070.34 ccw(c4565.18,4070.34) STM1.7@4553.56,4058.71
BUT1: JP8.2 STM1.27 | length 755.6
  Bottom Layer w10: JP8.2@4052,3421 4119,3421 4134,3436 4134,3541 4201,3608 4201,3791 4222.76,3812.76 STM1.27@4302.68,3812.76 ; JP8.2@4062.27,3410.73 cw(c4087.07,3385.93) 4087.07,3421 cw(c4087.07,3456.07) JP8.2@4062.27,3431.27 ; JP8.2@4069.34,3403.66 cw(c4111.21,3361.79) 4111.21,3421 cw(c4111.21,3480.21) JP8.2@4069.34,3438.34 ; STM1.27@4271.29,3807.94 ccw(c4259.66,3796.31) 4259.66,3812.76 ccw(c4259.66,3829.2) STM1.27@4271.29,3817.57
BUT2: JP8.3 STM1.28 | length 797.6
  Bottom Layer w10: JP8.3@4052,3515.53 ccw(c4052,3565.09) 4087.04,3530.04 ; JP8.3@4052,3521 4078,3521 4177,3620 4177,3821 4200.25,3844.25 STM1.28@4302.68,3844.25 ; JP8.3@4052,3525.53 ccw(c4052,3599.23) 4104.11,3547.11 ; JP8.3@4052,3535.53 ccw(c4052,3633.37) 4121.18,3564.18 ; JP8.3@4052,3545.53 ccw(c4052,3667.51) 4138.26,3581.26 ; STM1.28@4271.29,3839.44 ccw(c4259.66,3827.81) 4259.66,3844.25 ccw(c4259.66,3860.7) STM1.28@4271.29,3849.07
BUT3: JP8.4 STM1.29 | length 647.5
  Bottom Layer w10: JP8.4@4052,3621 4053,3620 4132,3620 4155,3643 4155,3842 4188.75,3875.75 STM1.29@4302.68,3875.75 ; JP8.4@4062.27,3610.73 cw(c4084.66,3588.34) 4084.66,3620 ; JP8.4@4062.27,3631.27 ccw(c4089.49,3658.49) 4089.49,3620 ; JP8.4@4069.34,3603.66 cw(c4108.8,3564.2) 4108.8,3620 ; JP8.4@4069.34,3638.34 ccw(c4113.63,3682.63) 4113.63,3620 ; STM1.29@4271.29,3870.93 ccw(c4259.66,3859.3) 4259.66,3875.75 ccw(c4259.66,3892.19) STM1.29@4271.29,3880.56
BUT4: JP8.5 STM1.30 | length 579.1
  Bottom Layer w10: JP8.5@4052,3721 4116,3721 4131,3736 4133,3736 4133,3868 4172.24,3907.24 STM1.30@4302.68,3907.24 ; JP8.5@4062.27,3710.73 cw(c4087.07,3685.93) 4087.07,3721 cw(c4087.07,3756.07) JP8.5@4062.27,3731.27 ; JP8.5@4069.34,3703.66 cw(c4111.21,3661.79) 4111.21,3721 cw(c4111.21,3780.21) JP8.5@4069.34,3738.34 ; STM1.30@4271.29,3902.43 ccw(c4259.66,3890.8) 4259.66,3907.24 ccw(c4259.66,3923.69) STM1.30@4271.29,3912.06
BUT5: JP8.6 STM1.31 | length 459
  Bottom Layer w10: JP8.6@4052,3821 4056,3825 4056,3830.28 4164.46,3938.74 STM1.31@4302.68,3938.74 ; JP8.6@4052,3845.53 ccw(c4052,3891.98) 4084.85,3859.13 ; JP8.6@4066.53,3821 cw(c4114.36,3821) 4080.54,3854.82 ; JP8.6@4076.53,3821 cw(c4148.5,3821) 4097.61,3871.89 ; STM1.31@4271.29,3933.92 ccw(c4259.66,3922.3) 4259.66,3938.74 ccw(c4259.66,3955.18) STM1.31@4271.29,3943.56
BUT6: JP8.7 STM1.32 | length 365
  Bottom Layer w10: JP8.7@4052,3921 4101,3921 ; JP8.7@4071.64,3906.3 cw(c4101,3884.32) 4101,3921 ; JP8.7@4071.64,3935.7 ccw(c4101,3957.68) 4101,3921 ; STM1.32@4271.29,3965.42 ccw(c4259.66,3953.79) 4259.66,3970.24 ccw(c4259.66,3986.68) STM1.32@4271.29,3975.05 ; STM1.32@4302.68,3970.24 4150.24,3970.24 4101,3921
COI_CHIP: R35.2 STM1.10 | length 1528.9
  Top Layer w10: v1(4735,3941) 5688,3941 5711,3918 v1(5711,3720) ; v1@4742.07,3933.93 cw(c4759.14,3916.86) 4759.14,3941 cw(c4759.14,3965.14) v1@4742.07,3948.07 ; v1@5703.93,3727.07 ccw(c5686.86,3744.14) 5711,3744.14 ccw(c5735.14,3744.14) v1@5718.07,3727.07
  Bottom Layer w10: STM1.10@4637.32,3938.74 4732.74,3938.74 v1(4735,3941) ; STM1.10@4668.71,3933.92 cw(c4680.34,3922.3) 4680.34,3938.74 cw(c4680.34,3955.18) STM1.10@4668.71,3943.56 ; 4705.4,3938.74 ccw(c4705.4,3970.6) v1@4727.93,3948.07 ; 4716.31,3938.74 cw(c4716.31,3922.31) v1@4727.93,3933.93 ; v1(5711,3720) 5776,3720 R35.2@5779,3723 ; v1@5718.07,3712.93 cw(c5735.14,3695.86) 5735.14,3720 cw(c5735.14,3744.14) v1@5718.07,3727.07
"CONG TAC TU": JP?.1 STM1.22 | length 414.9
  Bottom Layer w10: JP?.1@4213,3486 4213,3582 4234,3603 4397,3603 4422.76,3628.76 STM1.22@4422.76,3692.68 ; STM1.22@4417.94,3661.29 cw(c4406.31,3649.66) 4422.76,3649.66 cw(c4439.2,3649.66) STM1.22@4427.57,3661.29
CTRL_SOL: P3.4 Q3.2 | length 539.2
  Bottom Layer w40: Q3.2@3694,3175 3867.39,3001.61 P3.4@3867.39,2840.39 ; P3.4@3842.64,2865.14 ccw(c3782.9,2924.89) 3867.39,2924.89 ccw(c3951.89,2924.89) P3.4@3892.14,2865.14
CTRMOC: STM1.20 U1.2 | length 921.6
  Bottom Layer w10: STM1.20@4480.93,3661.29 cw(c4469.3,3649.66) 4485.75,3649.66 cw(c4502.19,3649.66) STM1.20@4490.56,3661.29 ; STM1.20@4485.75,3692.68 4485.75,3613.25 4523,3576 4524,3577 4793,3577 4825,3545 4825,3250 4807,3232 ; U1.2@4744,3232 4807,3232 ; U1.2@4779.49,3217.67 cw(c4807,3198.42) 4807,3232 ; U1.2@4779.49,3246.33 ccw(c4807,3265.58) 4807,3232